# Altium PCB AFE_Breakout.PcbDoc
Units mm, origin at the board's own origin, x right, y up, seen from the top; angles counter-clockwise.
Board outline 8.7 x 9.2 mm, 4 copper layers (Top Layer, Signal Layer 1, Signal Layer 2, Bottom Layer), stack 0.778 mm thick; 9 components, 28 nets, 73 pads, 18 vias.
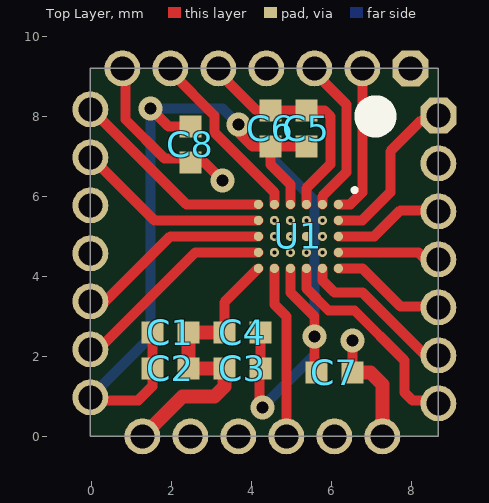
[diagram p0: Top Layer view]
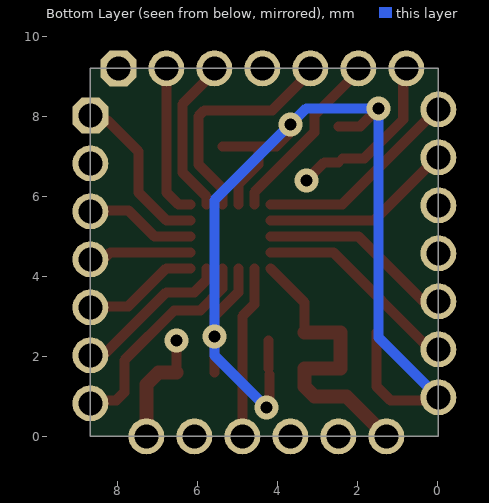
[diagram p1: Bottom Layer view, seen from below]
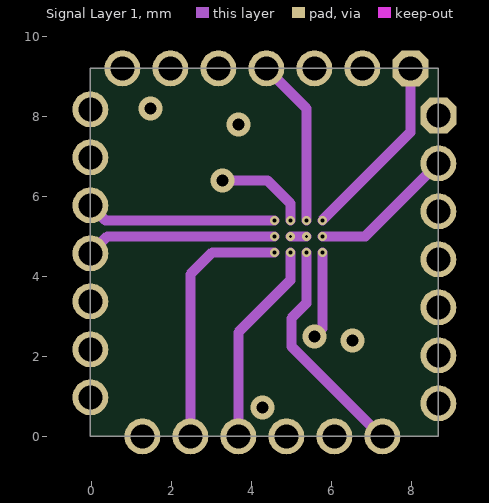
[diagram p2: Signal Layer 1]
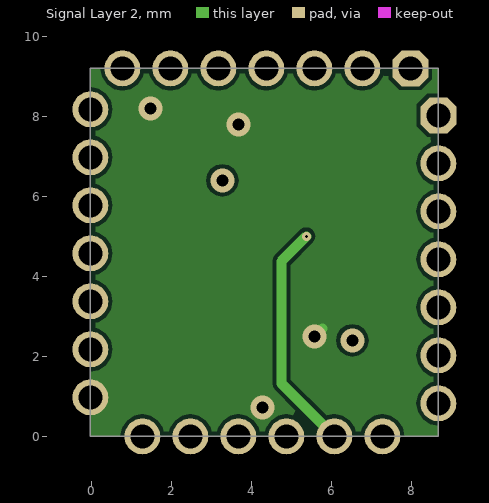
[diagram p3: Signal Layer 2]
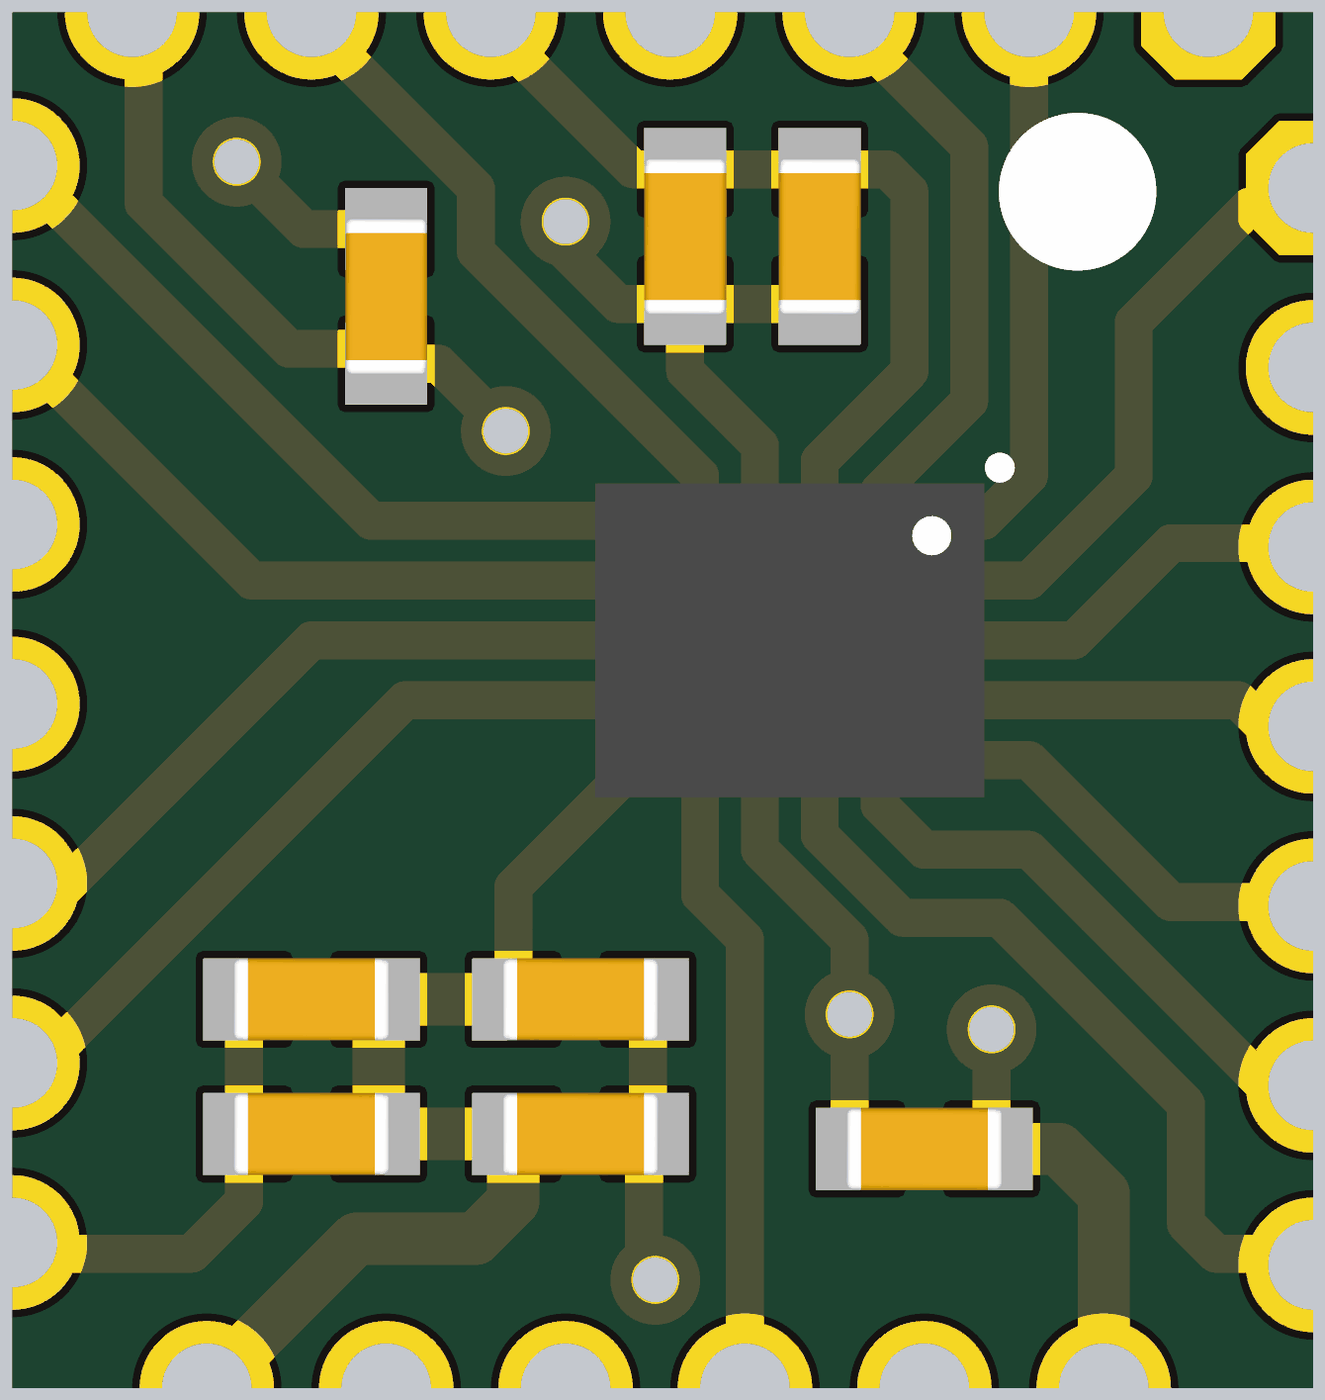
[diagram p4: 3D render of the assembled board from above, using the file's embedded part models]

## Layer stack, top to bottom
Top Solder: solder mask 0.0102, Solder Resist, Dk 3.5
Top Layer: signal copper 0.0356
Dielectric 1: core 0.254, FR-4, Dk 4.2
Signal Layer 1: signal copper 0.036
Dielectric 3: prepreg 0.127, Dk 4.2
Signal Layer 2: signal copper 0.036
Dielectric 2: core 0.254, Dk 4.2
Bottom Layer: signal copper 0.0356
Bottom Solder: solder mask 0.0102, Solder Resist, Dk 3.5

## Board outline
-0.025,0 8.675,0 8.675,9.2 -0.025,9.2

## Design rules (kind name [scope] priority, off if disabled: settings)
Clearance Clearance_Via_Via_Same_Net [isVia vs isVia] p1: gap=0.15 ignorepadtopadclearanceinfootprint=FALSE except(0: Arc-Hole Track-Hole SMDPad-Hole THPad-Hole Via-Hole Fill-Hole Poly-Hole Region-Hole Text-Hole)
Clearance Clearance_KeepOut [All vs OnLayer('Keep-Out Layer')] p2 off: gap=1 ignorepadtopadclearanceinfootprint=FALSE except(0: Arc-Hole Track-Hole SMDPad-Hole THPad-Hole Via-Hole Fill-Hole Poly-Hole Region-Hole Text-Hole)
Clearance Clearance_NDK [NOT PadIsPlated] p3: gap=0.5 ignorepadtopadclearanceinfootprint=FALSE except(0: Arc-Hole Track-Hole SMDPad-Hole THPad-Hole Via-Hole Fill-Hole Poly-Hole Region-Hole Text-Hole)
Clearance [All] p4: gap=0.1 ignorepadtopadclearanceinfootprint=FALSE except(0: Arc-Hole Track-Hole SMDPad-Hole THPad-Hole Via-Hole Fill-Hole Poly-Hole Region-Hole Text-Hole)
ComponentClearance [All] p1: gap=0 collisioncheckmode=3 verticalgap=0.254 showdistances=FALSE
FabricationTestPointUsage TestPointUsage [All] p1: valid=0 allowmultiple=FALSE
FabricationTestpoint Testpoint [All] p1: side=3 testpointundercomponent=TRUE minsize=1.016 maxsize=2.54 preferedsize=1.524 minholesize=0 maxholesize=1.016 preferedholesize=0.813 testpointgrid=0.025 allowsidetop=TRUE allowsidebottom=TRUE usegrid=TRUE gridtolerance=0
HoleSize [All] p1: absolutevalues=TRUE maxlimit=6 minlimit=0.08 maxpercent=80.000 minpercent=20.000
HoleToHoleClearance [All] p1: gap=0.247 allowstackedmicrovias=TRUE
MinimumAnnularRing MinimumAnnularRing_Vias [IsVia] p1: minimumring=0.01
MinimumAnnularRing [All] p2: minimumring=0.01
MinimumSolderMaskSliver [All] p1: minsoldermaskwidth=0.01
NetAntennae [All] p1 off: netantennaetolerance=0
PlaneClearance [All] p1: clearance=0.115
PlaneConnect PlaneConnect_Vias [isVia] p1: planeconnectstyle=Direct reliefexpansion=0.508 reliefentries=4 reliefconductorwidth=0.254 reliefairgap=0.254
PlaneConnect [All] p2: planeconnectstyle=Direct reliefexpansion=0.508 reliefentries=4 reliefconductorwidth=0.254 reliefairgap=0.254
PolygonConnect PolygonConnect_Vias [isVia] p1: connectstyle=Direct reliefconductorwidth=0.254 reliefentries=4 polygonreliefangle="90 Angle" airgapwidth=0.254
PolygonConnect [All] p2: connectstyle=Direct reliefconductorwidth=0.254 reliefentries=4 polygonreliefangle="90 Angle" airgapwidth=0.254
RoutingVias [All] p1: holewidth=0.5 width=0.8 viastyle="Through Hole" minholewidth=0.3 minwidth=0.5 maxholewidth=0.8 maxwidth=1
SMDEntry [All] p1: side=TRUE corner=TRUE anyangle=TRUE
SMDToCorner [All] p1 off: distance=196850
SilkToSilkClearance [All] p1 off: silktosilkclearance=0.15
SilkToSolderMaskClearance SilkscreenOverComponentPads [IsPad] p1 off: minsilkscreentomaskgap=0.15 clearancetoexposedcopper=FALSE
SolderMaskExpansion [All] p1: expansion=0.05 istentingtop=FALSE
ViasUnderSMD [All] p1: allowed=FALSE
Width [All] p1: maxlimit=10 minlimit=0.15 preferedwidth=0.254 checkconnectedcopper=TRUE
19 further rules are at their usual default settings.

## Components (designator, comment, footprint, x,y, rotation, side; value= is the part's Value field where it differs from the comment)
C1 "22u" CAPC1005X03N 1.975,2.6 r0 top
C2 "22u" CAPC1005X03N 1.975,1.7 r0 top
C3 "100n" CAPC1005X03N 3.775,1.7 r180 top
C4 "1n" CAPC1005X03N 3.775,2.6 r180 top
C5 "100n" CAPC1005X03N 5.375,7.7 r90 top
C6 "1n" CAPC1005X03N 4.475,7.7 r90 top
C7 "100n" CAPC1005X03N 6.075,1.6 r0 top
C8 "100n" CAPC1005X03N 2.475,7.3 r270 top
U1 "AFE4900" AFE4900_BGA_BreakoutFootprint 5.175,5 r270 top

## Footprints (in the part's own frame and the unit in brackets; to place one, negate y for a bottom-side part, rotate by r counter-clockwise, add the part's x,y. Pads: shape width x height; smd on the part's side, far side on the other; paste and mask are expansions set on the pad)
AFE4900_BGA_BreakoutFootprint [mm] "BGA, 30-Leads, Body 2.10x2.60mmx0.50mm, Pitch 0.40mm"
  round 0.23 smd: A1(-0.8,1) A2(-0.4,1) A3(0,1) A4(0.4,1) A5(0.8,1) B1(-0.8,0.6) B2(-0.4,0.6) B3(0,0.6) B4(0.4,0.6) B5(0.8,0.6) C1(-0.8,0.2) C2(-0.4,0.2) C3(0,0.2) C4(0.4,0.2) C5(0.8,0.2) D1(-0.8,-0.2) D2(-0.4,-0.2) D3(0,-0.2) D4(0.4,-0.2) D5(0.8,-0.2) E1(-0.8,-0.6) E2(-0.4,-0.6) E3(0,-0.6) E4(0.4,-0.6) E5(0.8,-0.6) F1(-0.8,-1) F2(-0.4,-1) F3(0,-1) F4(0.4,-1) F5(0.8,-1)
  silkscreen extent -1.2,1.36 -1.11,1.46, body extent -1.05,-1.3 1.05,1.3, height 0.5
CAPC1005X03N [mm] "Chip Capacitor, 2-Leads, Body 1,00x0,50mm, IPC Medium Density, 0402"
  rect 0.55x0.55 smd: 1(-0.45,0) 2(0.45,0)
  body extent -0.52,-0.27 0.53,0.28, height 0.35

## Part data
C1 C2: library part C_0402, "Kondensator 0402", Tested=False
C3 C5 C7 C8: library part C_100n_50V_0402, "Kondensator 100n 50V 0402", Supplier Part Number 1=2210822, Supplier 1=Farnell, Tested=False
C4 C6: library part C_1n_50V_0402, "Kondensator 1n 50V 0402", Supplier Part Number 1=399-10034-1-ND, Supplier 1=Digikey, Tested=False
U1: "Synchronized_ECG_and_PPG_AFE"

## Free pads (board coordinates)
  round 0.9 hole 0.6: 2(-0.025,0.975) 2(-0.025,6.975) 2(-0.025,8.175) 2(1.275,0) 2(2.475,0) 2(5.575,9.2) 2(6.775,9.2) 2(8.675,0.825) 2(8.675,2.025) 2(8.675,3.225) 2(8.675,4.425) 3(-0.025,5.775) 3(3.675,0) 3(4.375,9.2) 3(8.675,5.625) 4(-0.025,4.575) 4(3.175,9.2) 4(4.875,0) 4(8.675,6.825) 5(-0.025,3.375) 5(1.975,9.2) 5(6.075,0) 6(-0.025,2.175) 6(0.775,9.2) 6(7.275,0)
  oct 0.9x0.9 hole 0.6: 5(7.975,9.2) 6(8.675,8.025)

## Via types
v1: diameter 0.23, hole 0.1, Top Layer to Signal Layer 1, tented top, 7 vias
v2: diameter 0.6, hole 0.3, Top Layer to Bottom Layer, tented both sides, 6 vias
v3: diameter 0.23, hole 0.1, Top Layer to Signal Layer 1, 3 vias
v4: diameter 0.23, hole 0.08, Top Layer to Signal Layer 1, 1 vias
v5: diameter 0.23, hole 0.08, Signal Layer 1 to Signal Layer 2, 1 vias

## Nets (pads, with @x,y where several pads share a name; then routed paths per layer and width w, separated by ;. In a path a pad name is that pad's centre, name@x,y a point inside that pad or via, vN(x,y) a via of type N, cw(c..) or ccw(c..) an arc to the next point about the centre after c; other vN are vias at no path point)
"AFE ADC RDY": pad.6@-0.025,2.175 U1.F4 | length 5.2
  Top Layer w0.254: pad.6@0.175,2 0.175,2.173 2.602,4.6 U1.F4
"AFE CLK": pad.2@-0.025,8.175 U1.F1 | length 4.9
  Top Layer w0.254: pad.2@0.175,8 2.375,5.8 U1.F1
"AFE I2C CLK": pad.5@-0.025,3.375 U1.F3 | length 4.7
  Top Layer w0.254: pad.5@0.175,3.2 1.975,5 U1.F3
"AFE I2C DAT": pad.2@-0.025,6.975 U1.F2 | length 4.6
  Top Layer w0.254: pad.2@0.175,6.8 1.575,5.4 U1.F2
"AFE RESETZ": pad.5@1.975,9.2 U1.E1 | length 4.4
  Top Layer w0.254: pad.5@1.975,9.1 1.996,9.1 3.075,8.021 3.075,7.6 4.575,6.1 U1.E1
BG: C8.2 pad.6@0.775,9.2 U1.D2 | length 6.5
  Top Layer w0.254: pad.6@0.775,9.1 0.852,9.023 0.852,7.923 1.825,6.95 C8.2@2.375,6.95 ; C8.2 2.825,6.85 v2(3.275,6.4)
  Signal Layer 1 w0.254: v2(3.275,6.4) 4.4,6.4 4.975,5.825 v1(4.975,5.4)
DNC1/INM_ECG: pad.2@6.775,9.2 U1.A1 | length 3.7
  Top Layer w0.254: U1.A1 6.475,5.8 6.775,6.1 pad.2@6.775,9.1
DNC3/INP_ECG: pad.2@5.575,9.2 U1.B1 | length 3.9
  Top Layer w0.254: pad.2@5.575,9.1 6.375,8.3 6.375,6.6 5.775,6 U1.B1
DNC7/RLD_OUT: pad.3@4.375,9.2 U1.C2 | length 4.2
  Signal Layer 1 w0.254: pad.3@4.375,9.2 5.375,8.2 v1(5.375,5.4)
"I2C SPI SEL": pad.2@8.675,4.425 U1.A4 | length 2.4
  Top Layer w0.254: U1.A4 8.175,4.6 pad.2@8.475,4.3
INM: pad.3@8.675,5.625 U1.A3 | length 2.6
  Top Layer w0.254: U1.A3 7.075,5 7.725,5.65 8.325,5.65 pad.3@8.475,5.5
INM2: pad.4@8.675,6.825 U1.B3 | length 3.7
  Signal Layer 1 w0.254: v1(5.775,5) 6.85,5 pad.4@8.675,6.825
INM3: pad.2@8.675,3.225 U1.A5 | length 2.8
  Top Layer w0.254: U1.A5 6.775,4.2 7.725,3.25 8.325,3.25 pad.2@8.475,3.1
INP: pad.6@8.675,8.025 U1.A2 | length 3.9
  Top Layer w0.254: U1.A2 6.775,5.4 7.475,6.1 7.475,7.125 8.25,7.9 pad.6@8.475,7.9
INP2: pad.5@7.975,9.2 U1.B2 | length 4.7
  Signal Layer 1 w0.254: v1(5.775,5.4) 7.975,7.6 pad.5@7.975,9.2
INP3: pad.2@8.675,2.025 U1.B5 | length 3.8
  Top Layer w0.254: U1.B5 5.775,3.9 6.075,3.6 6.775,3.6 pad.2@8.475,1.9
"IO SUP": C7.2 pad.6@7.275,0 U1.C4 | length 8.7
  Top Layer w0.254: C7.2 v2(6.525,2.4)
  Top Layer w0.35: C7.2 6.975,1.6 7.275,1.3 pad.6@7.275,0
  Signal Layer 1 w0.254: v3(5.375,4.6) 5.375,3.325 5,2.95 5,2.25 7.25,0 pad.6@7.275,0
  Bottom Layer w0.254: v2@6.475,2.4 v2(6.525,2.4)
PROG_OUT1: pad.5@6.075,0 U1.D3 | length 6.2
  Signal Layer 1 w0.254: v4(4.975,5) v5(5.375,5)
  Signal Layer 2 w0.254: v5(5.375,5) 4.75,4.375 4.75,1.325 pad.5@6.075,0
"RX SUP": C5.2 C6.2 pad.4@3.175,9.2 U1.C1 | length 5.7
  Top Layer w0.254: pad.4@3.175,9.1 4.125,8.15 C6.2 C5.2 5.825,8.15 5.975,8 5.975,6.8 5.375,6.2 U1.C1
SDOUT: pad.3@-0.025,5.775 U1.E2 | length 4.8
  Signal Layer 1 w0.254: pad.3@-0.025,5.775 0.35,5.4 v1(4.575,5.4)
SEN: pad.4@-0.025,4.575 U1.E3 | length 4.8
  Signal Layer 1 w0.254: pad.4@-0.025,4.575 0.4,5 v1(4.575,5)
SGND: C1.1 C2.1 C3.1 C4.1 C5.1 C6.1 C7.1 C8.1 pad.2@-0.025,0.975 U1.B4 U1.D1 U1.D5 | length 33.2
  Top Layer w0.254: pad.2@0.175,0.9 1.175,0.9 1.525,1.25 C2.1 C1.1 ; v2(1.475,8.2) 1.925,7.75 C8.1 ; v2(3.675,7.8) 3.675,7.6 4.025,7.25 C6.1 ; v2@4.2,0.725 C3.1@4.2,1.55 ; C3.1 C4.1@4.225,2.4 ; U1.D5 4.975,3.6 5.575,3 v2(5.575,2.5) C7.1@5.575,1.6 ; U1.D1 4.975,6.3 4.475,6.8 C6.1 ; C5.1 C6.1
  Signal Layer 1 w0.254: v2(5.575,2.5) 5.775,2.7 v1(5.775,4.6)
  Signal Layer 2 w0.254: v2(5.575,2.5) v2@5.775,2.7
  Bottom Layer w0.254: pad.2@-0.025,0.975 1.475,2.475 v2(1.475,8.2) 3.275,8.2 v2(3.675,7.8) 5.575,5.9 v2(5.575,2.5) 5.575,2.025 v2(4.275,0.725)
TX1: pad.3@3.675,0 U1.D4 | length 5.1
  Signal Layer 1 w0.254: pad.3@3.675,0 3.675,2.6 4.975,3.9 v3(4.975,4.6)
TX2: pad.4@4.875,0 U1.E5 | length 4
  Top Layer w0.254: U1.E5 4.575,3.3 4.875,3 pad.4@4.875,0.3
TX3: pad.2@2.475,0 U1.E4 | length 6.4
  Signal Layer 1 w0.254: pad.2@2.475,0 2.475,4.05 3.025,4.6 v3(4.575,4.6)
TX4: pad.2@8.675,0.825 U1.C5 | length 5.3
  Top Layer w0.254: U1.C5 5.375,3.701 5.929,3.147 6.579,3.146 7.825,1.9 7.825,1.1 8.025,0.9 8.275,0.9 pad.2@8.475,0.7
"TX SUP": C1.2 C2.2 C3.2 C4.2 pad.2@1.275,0 U1.F5 | length 7.7
  Top Layer w0.254: C4.2 3.325,3.35 U1.F5
  Top Layer w0.35: pad.2@1.275,0 2.275,1 3.075,1 3.325,1.25 C3.2 C2.2 C1.2 C4.2
VCC_3.3V: 
pads on no net: U1.C3

## Polygon pours and split planes (outlines as drawn)
SGND on Signal Layer 2 "SGND_L03_P000" (solid, remove dead copper, pour order 0): -0.025,9.2 -0.025,0 8.675,0 8.675,9.2

## Silkscreen, mask and mechanical layers (free items; w line width, h text height)
Top Overlay:
  circle w0.8: c7.1,8 r0.127
Mechanical 1:
  the board outline again, w0.1
Mechanical 13:
  the board outline again, w0.1